# Altium PCB Mesanin.PcbDoc (part 1 of 2)
Units mm, origin at the board's own origin, x right, y up, seen from the top; angles counter-clockwise.
Board outline 85.5 x 78 mm, 4 copper layers (Top Layer, GND, UCCio, UCC), stack 0.602 mm thick; 40 components, 123 nets, 448 pads, 167 vias.
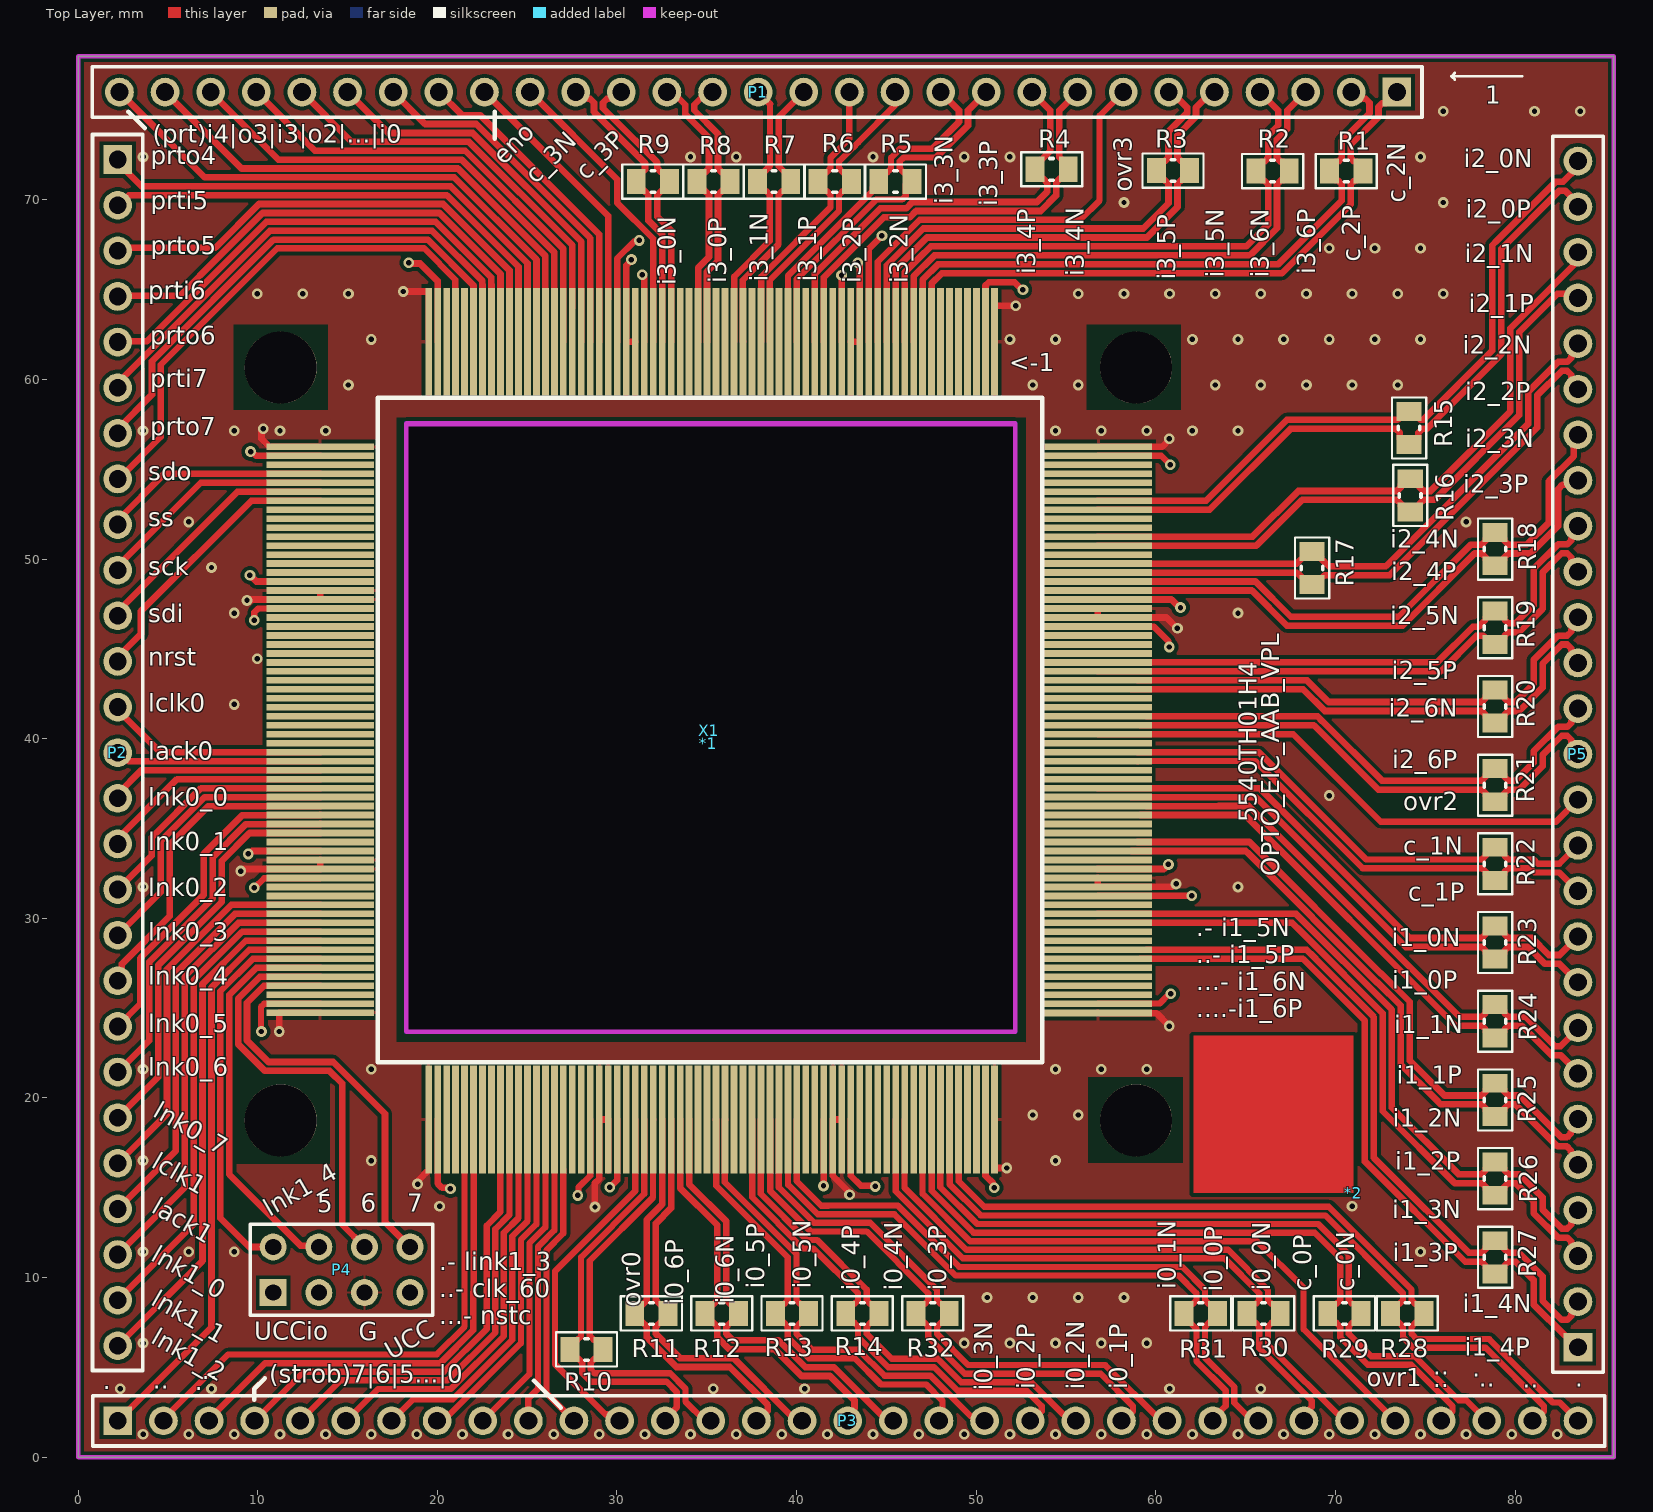
[diagram p0: Top Layer view]
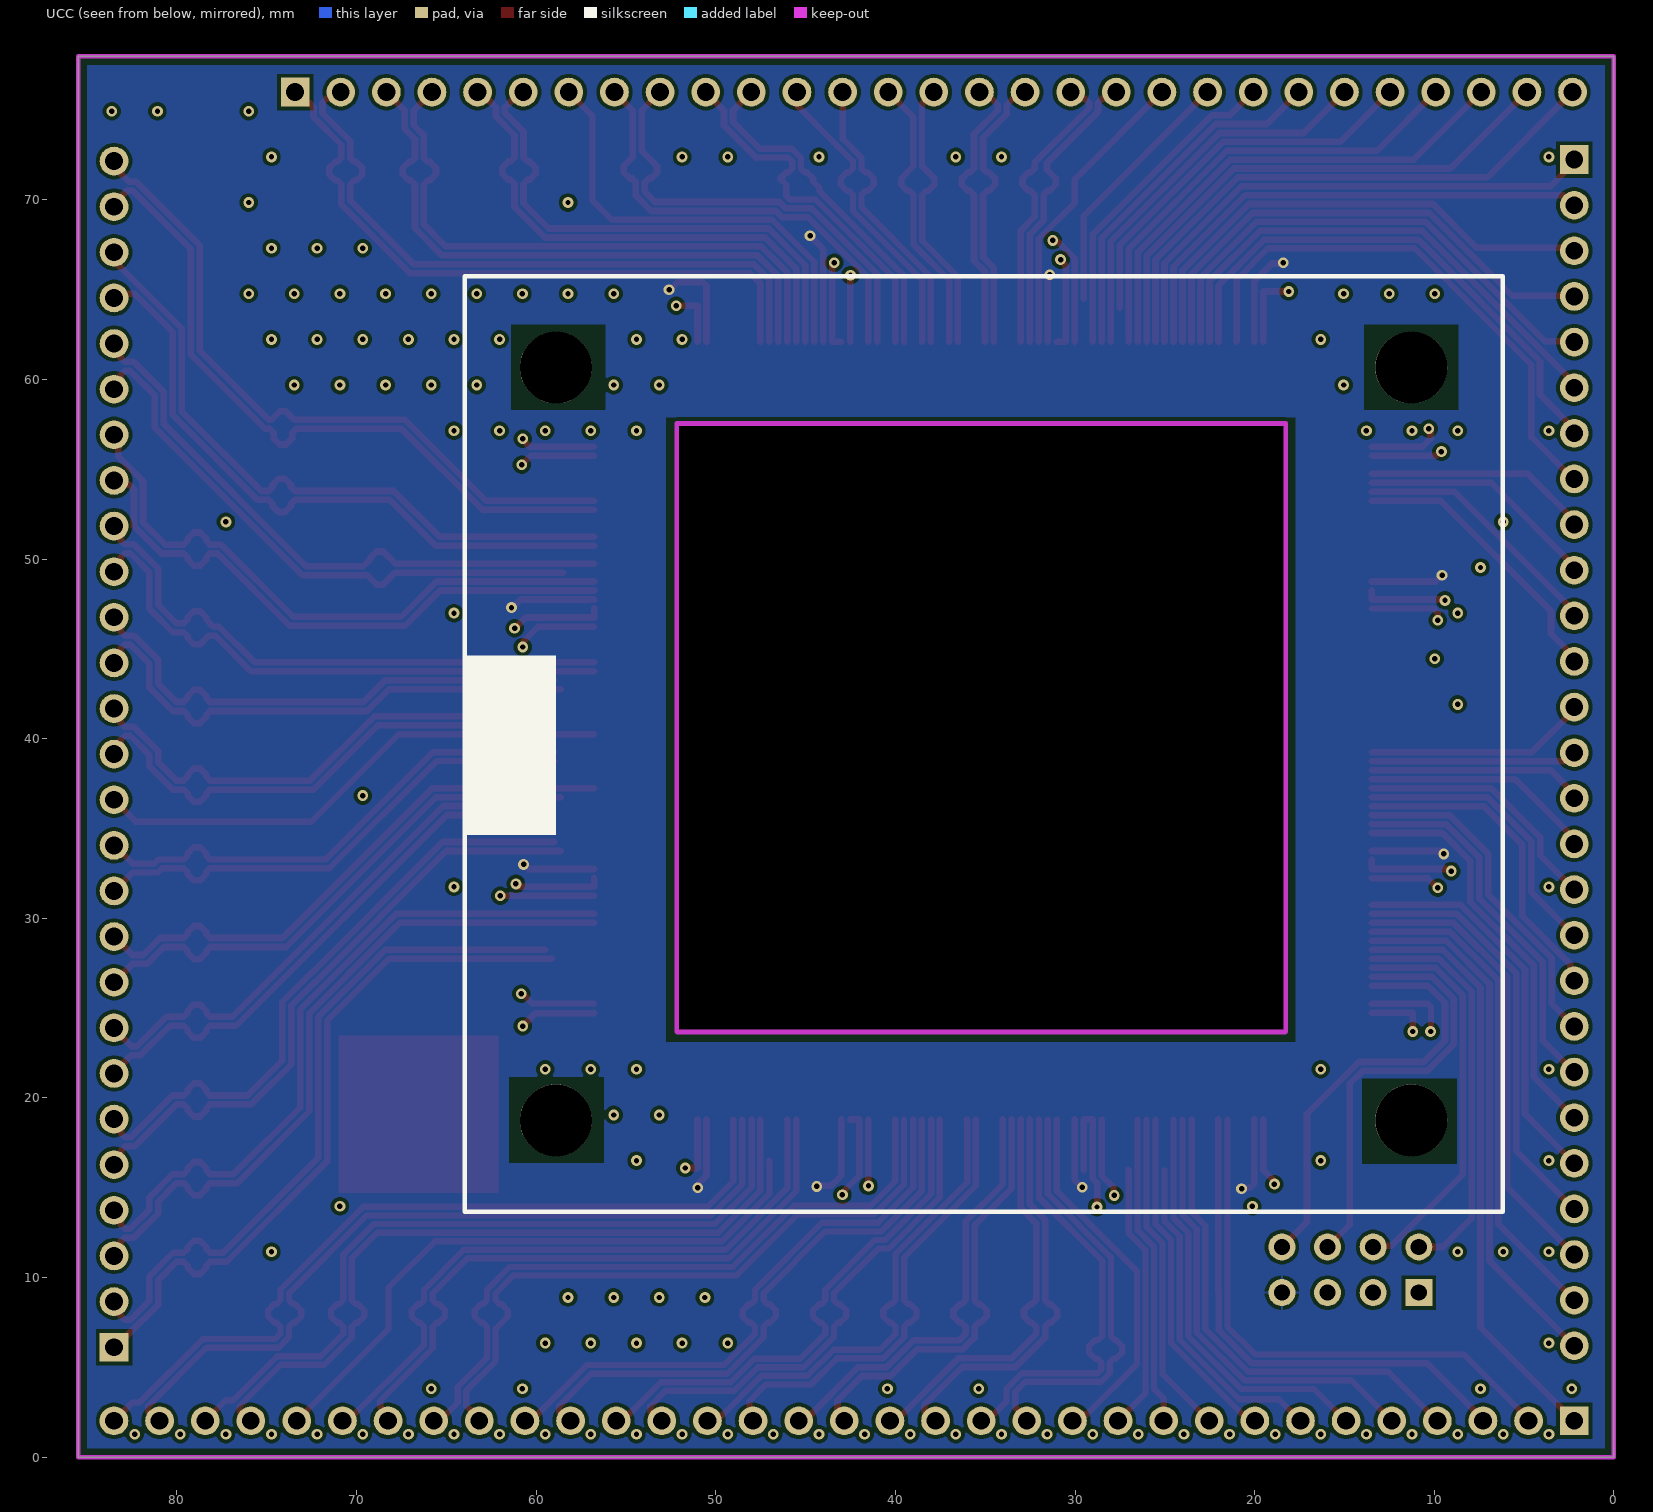
[diagram p1: UCC view, seen from below]
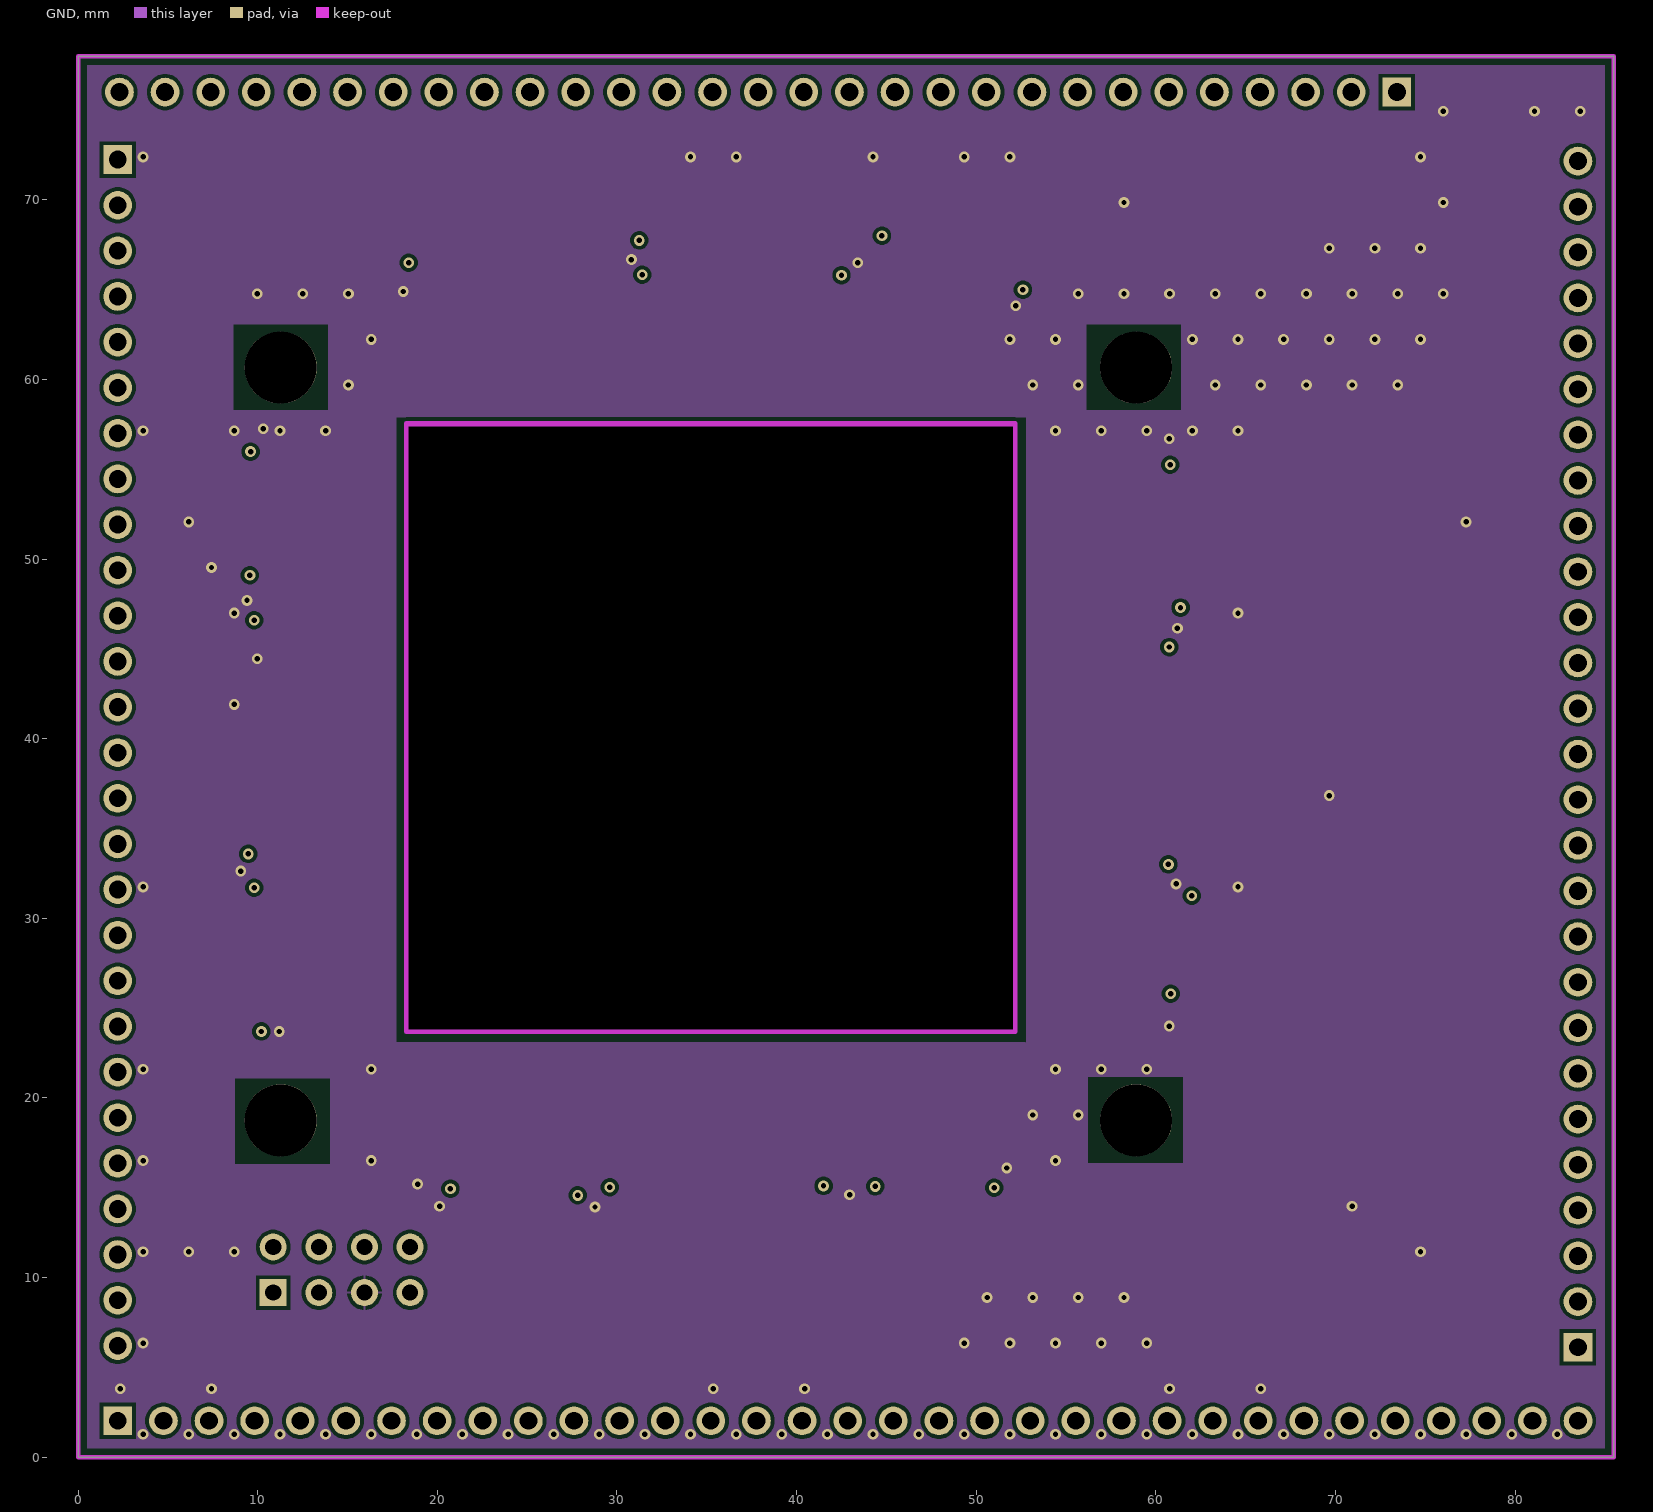
[diagram p2: GND]
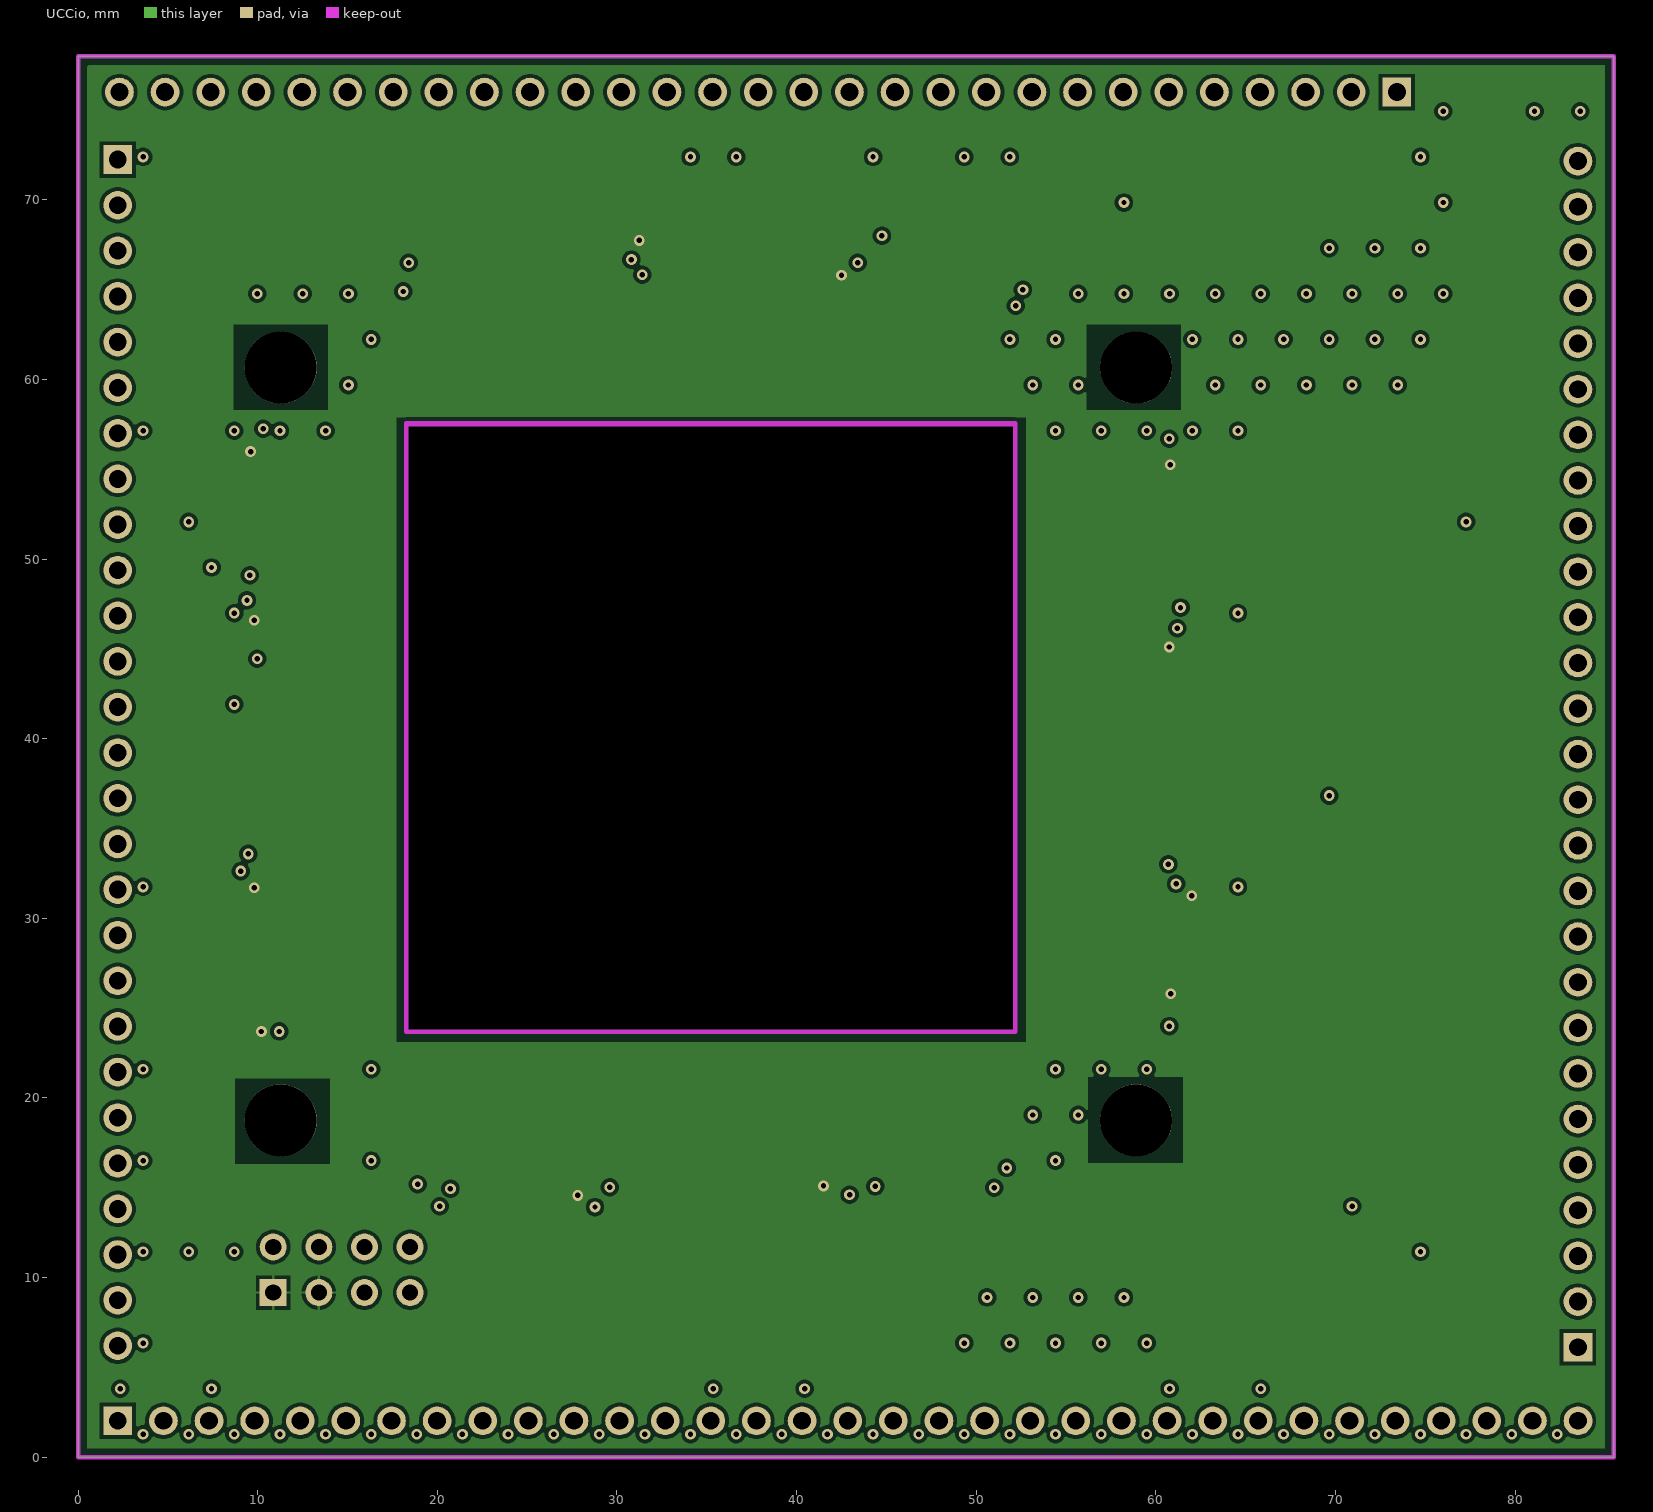
[diagram p3: UCCio]

## Layer stack, top to bottom
Top Solder: solder mask 0.0102, Solder Resist, Dk 3.5
Top Layer: signal copper 0.035
Dielectric 2: prepreg 0.0711, PP-006, Dk 4.1
GND: signal copper 0.035
Dielectric 1: dielectric 0.32, FR-4, Dk 4.8
UCCio: signal copper 0.035
Dielectric 3: prepreg 0.0711, PP-006, Dk 4.1
UCC: signal copper 0.035
Bottom Solder: solder mask 0.0102, Solder Resist, Dk 3.5

## Board outline
0,0 0,78 85.5,78 85.5,0
cut-out: 18.265,57.416 52.175,57.416 52.175,23.558 18.265,23.558

## Design rules (kind name [scope] priority, off if disabled: settings)
BoardOutlineClearance [OnLayer('Multi-Layer')] p1: gap=0.254 ignorepadtopadclearanceinfootprint=FALSE except(0: Arc-SplitContinuation Track-SplitContinuation SMDPad-SplitContinuation THPad-SplitContinuation Via-SplitContinuation Fill-SplitContinuation Poly-SplitContinuation Region-SplitContinuation Text-SplitContinuation; 0.4: Arc-OutlineEdge Track-OutlineEdge SMDPad-OutlineEdge THPad-OutlineEdge Via-OutlineEdge Fill-OutlineEdge Poly-OutlineEdge Region-OutlineEdge Text-OutlineEdge)
Clearance [All] p1: gap=0.125 ignorepadtopadclearanceinfootprint=FALSE except(0.2: Arc-Fill Arc-Poly Track-Fill Track-Poly SMDPad-Fill SMDPad-Poly THPad-Fill THPad-Poly Via-Fill Via-Poly Fill-Fill Fill-Poly Poly-Poly Poly-Region Poly-Text; 0.25: Arc-Hole Track-Hole SMDPad-Hole THPad-Hole Via-Hole Fill-Hole Poly-Hole Region-Hole Text-Hole) // Standart
DiffPairsRouting [All] p1: maxlimit=0.254 minlimit=0.127 mostfreqgap=0.13 toplayer_minwidth=0.127 toplayer_maxwidth=0.381 toplayer_prefwidth=0.37 midlayer1_minwidth=0.127 midlayer1_maxwidth=0.381 midlayer1_prefwidth=0.37 midlayer2_minwidth=0.127 midlayer2_maxwidth=0.381 midlayer2_prefwidth=0.37 bottomlayer_minwidth=0.127 bottomlayer_maxwidth=0.381 bottomlayer_prefwidth=0.37 maxuncoupledlength=12.7
HoleSize [All] p1: absolutevalues=TRUE maxlimit=5 minlimit=0.3 maxpercent=80.000 minpercent=20.000
MinimumSolderMaskSliver [All] p1: minsoldermaskwidth=0.1
PlaneClearance "PlaneClearance-1 1/2 Oz" [All] p1: clearance=0.2 // Standart
PlaneConnect "TermalConnect-1 1/2 Oz" [All] p1: planeconnectstyle=Relief reliefexpansion=0.2 reliefentries=4 reliefconductorwidth=0.2 reliefairgap=0.2 // Standart
PolygonConnect "PolygonConnect-1 1/2 Oz" [All] p1: thpad.connectstyle=Relief thpad.reliefconductorwidth=0.15 thpad.reliefentries=4 thpad.polygonreliefangle="90 Angle" thpad.airgapwidth=0.2 smdpad.connectstyle=Relief smdpad.reliefconductorwidth=0.2 smdpad.reliefentries=4 smdpad.polygonreliefangle="90 Angle" smdpad.airgapwidth=0.2 via.connectstyle=Direct via.reliefconductorwidth=0.254 via.reliefentries=4 via.polygonreliefangle="90 Angle" via.airgapwidth=0.254 // Standart
RoutingVias [All] p1: holewidth=0.3 width=1.27 viastyle="Through Hole" minholewidth=0.3 minwidth=0.6 maxholewidth=0.711 maxwidth=1.27
SilkToSilkClearance [All] p1: silktosilkclearance=0
SilkToSolderMaskClearance [IsPad] p1: minsilkscreentomaskgap=0 clearancetoexposedcopper=TRUE
SolderMaskExpansion [All] p1: expansion=0.102 istentingtop=FALSE
UnRoutedNet [All] p1: checkbadconnections=TRUE
Width [All] p1: maxlimit=2.5 minlimit=0.125 preferedwidth=0.37
22 further rules are at their usual default settings.

## Classes and differential pairs
differential pair adci1_1: +adci1_1_P -adci1_1_N
differential pair adci1_0: +adci1_0_P -adci1_0_N
differential pair adci3_6: +adci3_6_p -adci3_6_n
differential pair adci3_5: +adci3_5_p -adci3_5_n
differential pair adci3_4: +adci3_4_p -adci3_4_n
differential pair adci3_3: +adci3_3_p -adci3_3_n
differential pair adci3_2: +adci3_2_p -adci3_2_n
differential pair adci3_1: +adci3_1_p -adci3_1_N
differential pair adci3_0: +adci3_0_P -adci3_0_N
differential pair adci2_6: +adci2_6_P -adci2_6_N
differential pair adci2_5: +adci2_5_P -adci2_5_N
differential pair adci2_4: +adci2_4_P -adci2_4_N
differential pair adci2_3: +adci2_3_P -adci2_3_N
differential pair adci2_2: +adci2_2_P -adci2_2_N
differential pair adci2_1: +adci2_1_P -adci2_1_N
differential pair adci2_0: +adci2_0_P -adci2_0_N
differential pair adci1_6: +adci1_6_P -adci1_6_N
differential pair adci1_5: +adci1_5_P -adci1_5_N
differential pair adci1_4: +adci1_4_P -adci1_4_N
differential pair adci1_3: +adci1_3_P -adci1_3_N
differential pair adci1_2: +adci1_2_P -adci1_2_N
differential pair adci0_6: +adci0_6_P -adci0_6_N
differential pair adci0_5: +adci0_5_P -adci0_5_N
differential pair adci0_4: +adci0_4_P -adci0_4_N
differential pair adci0_3: +adci0_3_P -adci0_3_N
differential pair adci0_2: +adci0_2_P -adci0_2_N
differential pair adci0_1: +adci0_1_P -adci0_1_N
differential pair adci0_0: +adci0_0_P -adci0_0_N
differential pair adcc_3: +adcc_3_P -adcc_3_N
differential pair adcc_2: +adcc_2_p -adcc_2_n
differential pair adcc_1: +adcc_1_P -adcc_1_N
differential pair adcc_0: +adcc_0_P -adcc_0_N

## Components (designator, comment, footprint, x,y, rotation, side; value= is the part's Value field where it differs from the comment)
*1 "Грелка" Грелка 35.087,39.705 r90 top locked
*2 "Номер образца" "Номер образца" 71,14.7 r0 top
P1 "Top" HEADER29 75.174,76.044 r180 top locked
P2 "Left" HEADER27 1.72,79.923 r270 top locked
P3 "Bottom" HEADER33 -2.814,0.779 r0 top locked
P4 "Header 4X2" HDR2X4 10.86,9.16 r0 top
P5 "Right" HEADER27 83.98,-1.563 r90 top locked
R1 "100" RES_0805 70.6,71.6 r180 top
R2 "100" RES_0805 66.5,71.6 r180 top
R3 "100" RES_0805 60.957,71.628 r180 top
R4 "100" RES_0805 54.2,71.7 r0 top
R5 "100" RES_0805 45.5,71.016 r180 top locked
R6 "100" RES_0805 42.125,71.016 r0 top locked
R7 "100" RES_0805 38.75,71.016 r180 top locked
R8 "100" RES_0805 35.375,71.016 r180 top locked
R9 "100" RES_0805 32,71.016 r180 top locked
R10 "100" RES_0805 28.3,6 r180 top
R11 "100" RES_0805 31.915,8 r180 top locked
R12 "100" RES_0805 35.83,8 r180 top locked
R13 "100" RES_0805 39.745,8 r180 top locked
R14 "100" RES_0805 43.66,8 r180 top locked
R15 "100" RES_0805 74.1,57.3 r270 top
R16 "100" RES_0805 74.162,53.544 r270 top locked
R17 "100" RES_0805 68.7,49.5 r270 top locked
R18 "100" RES_0805 78.887,50.556 r270 top locked
R19 "100" RES_0805 78.887,46.175 r270 top locked
R20 "100" RES_0805 78.887,41.794 r270 top locked
R21 "100" RES_0805 78.887,37.412 r270 top locked
R22 "100" RES_0805 78.887,33.031 r270 top locked
R23 "100" RES_0805 78.887,28.65 r270 top locked
R24 "100" RES_0805 78.887,24.269 r270 top locked
R25 "100" RES_0805 78.887,19.887 r270 top locked
R26 "100" RES_0805 78.887,15.506 r270 top locked
R27 "100" RES_0805 78.887,11.125 r270 top locked
R28 "100" RES_0805 74,8 r180 top locked
R29 "100" RES_0805 70.5,8 r180 top locked
R30 "100" RES_0805 66,8 r180 top locked
R31 "100" RES_0805 62.5,8 r180 top locked
R32 "100" RES_0805 47.575,8 r180 top locked
X1 "5540TH01H4" 5540TH01H4 35.275,40.499 r180 top locked

## Footprints (in the part's own frame and the unit in brackets; to place one, negate y for a bottom-side part, rotate by r counter-clockwise, add the part's x,y. Pads: shape width x height; smd on the part's side, far side on the other; paste and mask are expansions set on the pad)
5540TH01H4 [mm]
  rect 0.375x6 smd: 1(-15.74,-21.601) 2(-15.24,-21.601) 3(-14.74,-21.601) 4(-14.24,-21.601) 5(-13.74,-21.601) 6(-13.24,-21.601) 7(-12.74,-21.601) 8(-12.24,-21.601) 9(-11.74,-21.601) 10(-11.24,-21.601) 11(-10.74,-21.601) 12(-10.24,-21.601) 13(-9.74,-21.601) 14(-9.24,-21.601) 15(-8.74,-21.601) 16(-8.24,-21.601) 17(-7.74,-21.601) 18(-7.24,-21.601) 19(-6.74,-21.601) 20(-6.24,-21.601) 21(-5.74,-21.601) 22(-5.24,-21.601) 23(-4.74,-21.601) 24(-4.24,-21.601) 25(-3.74,-21.601) 26(-3.24,-21.601) 27(-2.74,-21.601) 28(-2.24,-21.601) 29(-1.74,-21.601) 30(-1.24,-21.601) 31(-0.74,-21.601) 32(-0.24,-21.601) 33(0.26,-21.601) 34(0.76,-21.601) 35(1.26,-21.601) 36(1.76,-21.601) 37(2.26,-21.601) 38(2.76,-21.601) 39(3.26,-21.601) 40(3.76,-21.601) 41(4.26,-21.601) 42(4.76,-21.601) 43(5.26,-21.601) 44(5.76,-21.601) 45(6.26,-21.601) 46(6.76,-21.601) 47(7.26,-21.601) 48(7.76,-21.601) 49(8.26,-21.601) 50(8.76,-21.601) 51(9.26,-21.601) 52(9.76,-21.601) 53(10.26,-21.601) 54(10.76,-21.601) 55(11.26,-21.601) 56(11.76,-21.601) 57(12.26,-21.601) 58(12.76,-21.601) 59(13.26,-21.601) 60(13.76,-21.601) 61(14.26,-21.601) 62(14.76,-21.601) 63(15.26,-21.601) 64(15.76,-21.601) 129(15.76,21.701) 130(15.26,21.701) 131(14.76,21.701) 132(14.26,21.701) 133(13.76,21.701) 134(13.26,21.701) 135(12.76,21.701) 136(12.26,21.701) 137(11.76,21.701) 138(11.26,21.701) 139(10.76,21.701) 140(10.26,21.701) 141(9.76,21.701) 142(9.26,21.701) 143(8.76,21.701) 144(8.26,21.701) 145(7.76,21.701) 146(7.26,21.701) 147(6.76,21.701) 148(6.26,21.701) 149(5.76,21.701) 150(5.26,21.701) 151(4.76,21.701) 152(4.26,21.701) 153(3.76,21.701) 154(3.26,21.701) 155(2.76,21.701) 156(2.26,21.701) 157(1.76,21.701) 158(1.26,21.701) 159(0.76,21.701) 160(0.26,21.701) 161(-0.24,21.701) 162(-0.74,21.701) 163(-1.24,21.701) 164(-1.74,21.701) 165(-2.24,21.701) 166(-2.74,21.701) 167(-3.24,21.701) 168(-3.74,21.701) 169(-4.24,21.701) 170(-4.74,21.701) 171(-5.24,21.701) 172(-5.74,21.701) 173(-6.24,21.701) 174(-6.74,21.701) 175(-7.24,21.701) 176(-7.74,21.701) 177(-8.24,21.701) 178(-8.74,21.701) 179(-9.24,21.701) 180(-9.74,21.701) 181(-10.24,21.701) 182(-10.74,21.701) 183(-11.24,21.701) 184(-11.74,21.701) 185(-12.24,21.701) 186(-12.74,21.701) 187(-13.24,21.701) 188(-13.74,21.701) 189(-14.24,21.701) 190(-14.74,21.701) 191(-15.24,21.701) 192(-15.74,21.701)
  rect 6x0.375 smd: 65(21.8,-15.749) 66(21.8,-15.249) 67(21.8,-14.749) 68(21.8,-14.249) 69(21.8,-13.749) 70(21.8,-13.249) 71(21.8,-12.749) 72(21.8,-12.249) 73(21.8,-11.749) 74(21.8,-11.249) 75(21.8,-10.749) 76(21.8,-10.249) 77(21.8,-9.749) 78(21.8,-9.249) 79(21.8,-8.749) 80(21.8,-8.249) 81(21.8,-7.749) 82(21.8,-7.249) 83(21.8,-6.749) 84(21.8,-6.249) 85(21.8,-5.749) 86(21.8,-5.249) 87(21.8,-4.749) 88(21.8,-4.249) 89(21.8,-3.749) 90(21.8,-3.249) 91(21.8,-2.749) 92(21.8,-2.249) 93(21.8,-1.749) 94(21.8,-1.249) 95(21.8,-0.749) 96(21.8,-0.249) 97(21.8,0.251) 98(21.8,0.751) 99(21.8,1.251) 100(21.8,1.751) 101(21.8,2.251) 102(21.8,2.751) 103(21.8,3.251) 104(21.8,3.751) 105(21.8,4.251) 106(21.8,4.751) 107(21.8,5.251) 108(21.8,5.751) 109(21.8,6.251) 110(21.8,6.751) 111(21.8,7.251) 112(21.8,7.751) 113(21.8,8.251) 114(21.8,8.751) 115(21.8,9.251) 116(21.8,9.751) 117(21.8,10.251) 118(21.8,10.751) 119(21.8,11.251) 120(21.8,11.751) 121(21.8,12.251) 122(21.8,12.751) 123(21.8,13.251) 124(21.8,13.751) 125(21.8,14.251) 126(21.8,14.751) 127(21.8,15.251) 128(21.8,15.751) 193(-21.5,15.775) 194(-21.5,15.251) 195(-21.5,14.751) 196(-21.5,14.251) 197(-21.5,13.751) 198(-21.5,13.251) 199(-21.5,12.751) 200(-21.5,12.251) 201(-21.5,11.751) 202(-21.5,11.251) 203(-21.5,10.751) 204(-21.5,10.251) 205(-21.5,9.751) 206(-21.5,9.251) 207(-21.5,8.751) 208(-21.5,8.251) 209(-21.5,7.751) 210(-21.5,7.251) 211(-21.5,6.751) 212(-21.5,6.251) 213(-21.5,5.751) 214(-21.5,5.251) 215(-21.5,4.751) 216(-21.5,4.251) 217(-21.5,3.751) 218(-21.5,3.251) 219(-21.5,2.751) 220(-21.5,2.251) 221(-21.5,1.751) 222(-21.5,1.251) 223(-21.5,0.751) 224(-21.5,0.251) 225(-21.5,-0.249) 226(-21.5,-0.749) 227(-21.5,-1.249) 228(-21.5,-1.749) 229(-21.5,-2.249) 230(-21.5,-2.749) 231(-21.5,-3.249) 232(-21.5,-3.749) 233(-21.5,-4.249) 234(-21.5,-4.749) 235(-21.5,-5.249) 236(-21.5,-5.749) 237(-21.5,-6.249) 238(-21.5,-6.749) 239(-21.5,-7.249) 240(-21.5,-7.749) 241(-21.5,-8.249) 242(-21.5,-8.749) 243(-21.5,-9.249) 244(-21.5,-9.749) 245(-21.5,-10.249) 246(-21.5,-10.749) 247(-21.5,-11.249) 248(-21.5,-11.749) 249(-21.5,-12.249) 250(-21.5,-12.749) 251(-21.5,-13.249) 252(-21.5,-13.749) 253(-21.5,-14.249) 254(-21.5,-14.749) 255(-21.5,-15.249) 256(-21.525,-15.75)
  silkscreen extent -18.4,-18.47 18.6,18.52
HDR2X4 [mm] "Connector; Header; 4x2 Position"
  rect 1.5x1.5 hole 0.9: 1(0,0)
  round 1.5 hole 0.9: 2(0,2.54) 3(2.54,0) 4(2.54,2.54) 5(5.08,0) 6(5.08,2.54) 7(7.62,0) 8(7.62,2.54)
  silkscreen extent -1.27,-1.27 8.89,3.81
HEADER27 [mm]
  rect 1.6x1.6 hole 0.99: 1(7.683,0.48)
  round 1.6 hole 0.99: 2(10.223,0.48) 3(12.763,0.48) 4(15.303,0.48) 5(17.843,0.48) 6(20.383,0.48) 7(22.923,0.48) 8(25.463,0.48) 9(28.003,0.48) 10(30.543,0.48) 11(33.083,0.48) 12(35.623,0.48) 13(38.163,0.48) 14(40.703,0.48) 15(43.243,0.48) 16(45.783,0.48) 17(48.323,0.48) 18(50.863,0.48) 19(53.403,0.48) 20(55.943,0.48) 21(58.483,0.48) 22(61.023,0.48) 23(63.563,0.48) 24(66.103,0.48) 25(68.643,0.48) 26(71.183,0.48) 27(73.723,0.48)
  silkscreen extent 6.28,-0.92 75.1,1.88
HEADER29 [mm]
  rect 1.6x1.6 hole 0.99: 1(1.754,0.044)
  round 1.6 hole 0.99: 2(4.294,0.044) 3(6.834,0.044) 4(9.374,0.044) 5(11.914,0.044) 6(14.454,0.044) 7(16.994,0.044) 8(19.534,0.044) 9(22.074,0.044) 10(24.614,0.044) 11(27.154,0.044) 12(29.694,0.044) 13(32.234,0.044) 14(34.774,0.044) 15(37.314,0.044) 16(39.854,0.044) 17(42.394,0.044) 18(44.934,0.044) 19(47.474,0.044) 20(50.014,0.044) 21(52.554,0.044) 22(55.094,0.044) 23(57.634,0.044) 24(60.174,0.044) 25(62.714,0.044) 26(65.254,0.044) 27(67.794,0.044) 28(70.334,0.044) 29(72.874,0.044)
  silkscreen extent 0.35,-1.36 74.4,1.44
HEADER33 [mm]
  rect 1.6x1.6 hole 0.99: 1(5.019,1.24)
  round 1.6 hole 0.99: 2(7.559,1.24) 3(10.099,1.24) 4(12.639,1.24) 5(15.179,1.24) 6(17.719,1.24) 7(20.259,1.24) 8(22.799,1.24) 9(25.339,1.24) 10(27.879,1.24) 11(30.419,1.24) 12(32.959,1.24) 13(35.499,1.24) 14(38.039,1.24) 15(40.579,1.24) 16(43.119,1.24) 17(45.659,1.24) 18(48.199,1.24) 19(50.739,1.24) 20(53.279,1.24) 21(55.819,1.24) 22(58.359,1.24) 23(60.899,1.24) 24(63.439,1.24) 25(65.979,1.24) 26(68.519,1.24) 27(71.059,1.24) 28(73.599,1.24) 29(76.139,1.24) 30(78.699,1.24) 31(81.239,1.24) 32(83.779,1.24) 33(86.319,1.24)
  silkscreen extent 3.62,-0.16 87.8,2.64
RES_0805 [mm]
  rect 1.05x1.4 smd: 1(-0.925,0) 2(0.925,0)
  silkscreen extent -1.7,-0.95 1.7,0.95, body extent -1.1,-0.7 1.1,0.7, height 1
Грелка [mm]
  round 4 hole 4 unplated: 0(-20.955,23.813) 0(-20.955,-23.812) 0(20.955,23.813) 0(20.955,-23.812)
"Номер образца" [mm]
  Top Layer region: -8.915,-0.001 0,-0.001 0,8.762 -8.915,8.762

## Part data
P1: library part HEADER29
P2 P5: library part HEADER27
P3: library part HEADER33
P4: "Header, 4-Pin, Dual row", LatestRevisionDate=17-Jul-2002, LatestRevisionNote="Re-released for DXP Platform.", Publisher="Altium Limited"
R1 R2 R3 R4 R5 R6 R7 R8 R9 R10 R11 R12 R13 R14 R15 R16 R17 R18 R19 R20 R21 R22 R23 R24 R25 R26 R27 R28 R29 R30 R31 R32: library part RES

## Via types
v1: diameter 0.6, hole 0.3, Top Layer to UCC, 167 vias

## Nets (pads, with @x,y where several pads share a name; then routed paths per layer and width w, separated by ;. In a path a pad name is that pad's centre, name@x,y a point inside that pad or via, vN(x,y) a via of type N, cw(c..) or ccw(c..) an arc to the next point about the centre after c; other vN are vias at no path point)
adcc_0_N: P3.28 R30.1 X1.182 | length 36.3
  Top Layer w0.35: X1.182@46.015,18.798 46.005,18.788 46.005,14.997 49.456,11.546 64.022,11.546 66.24,9.328 66.24,8.73 66.445,8.525 66.575,8.525 66.925,8.175 R30.1@66.925,8 ; R30.1@66.925,7.825 66.575,7.475 66.445,7.475 66.24,7.27 66.24,6.871 66.24,6.261 70.482,2.02 P3.28@70.785,2.02
adcc_0_P: P3.27 R30.2 X1.181 | length 35.6
  Top Layer w0.35: X1.181@45.515,18.798 45.525,18.788 45.525,14.798 49.257,11.066 63.823,11.066 65.76,9.129 65.76,8.73 65.555,8.525 65.425,8.525 65.075,8.175 R30.2@65.075,8 ; R30.2@65.075,7.825 65.425,7.475 65.555,7.475 65.76,7.27 65.76,6.672 65.76,6.063 68.683,3.14 68.683,2.795 68.245,2.358 P3.27@68.245,2.02
adcc_1_N: P5.12 R22.1 X1.222 | length 28.2
  Top Layer w0.35: X1.222@59,39.238 65.743,39.238 71.709,33.271 78.157,33.271 78.362,33.476 78.362,33.606 78.712,33.956 R22.1@78.887,33.956 79.062,33.956 79.412,33.606 79.412,33.476 79.618,33.271 81.032,33.271 81.273,33.03 82.47,33.03 P5.12@83.5,34.06
adcc_1_P: P5.11 R22.2 X1.221 | length 28.2
  Top Layer w0.35: X1.221@59,38.737 59.02,38.758 65.544,38.758 71.511,32.791 78.157,32.791 78.362,32.586 78.362,32.456 78.712,32.106 R22.2@78.887,32.106 79.062,32.106 79.412,32.456 79.412,32.586 79.618,32.791 80.833,32.791 81.074,32.55 82.47,32.55 P5.11@83.5,31.52
adcc_2_n: P1.1 R1.1 X1.8 | length 36.5
  Top Layer w0.37: X1.8@47.515,62.1 47.517,62.103 47.517,65.344 48.082,65.909 67.009,65.909 70.85,69.75 70.85,70.868 71.067,71.085 71.185,71.085 71.525,71.425 R1.1@71.525,71.6 71.525,71.775 71.185,72.115 71.067,72.115 70.85,72.332 70.85,73.068 72.4,74.618 72.4,75.168 72.617,75.385 72.805,75.385 P1.1@73.42,76
adcc_2_p: P1.2 R1.2 X1.9 | length 36.7
  Top Layer w0.37: X1.9@47.015,62.1 47.015,64.913 47.017,64.915 47.017,65.551 47.875,66.409 66.802,66.409 70.35,69.957 70.35,70.868 70.133,71.085 70.015,71.085 69.675,71.425 R1.2@69.675,71.6 69.675,71.775 70.015,72.115 70.133,72.115 70.35,72.332 70.35,73.275 71.9,74.825 71.9,75.41 71.683,75.627 71.586,75.627 71.213,76 P1.2@70.88,76
adcc_3_N: P1.19 R9.2 X1.38 | length 16.6
  Top Layer w0.37: P1.19@27.7,76 28.033,76 28.406,75.627 28.503,75.627 28.72,75.41 28.72,74.897 29.472,74.145 31.563,72.054 31.563,71.678 31.075,71.191 31.075,70.841 31.415,70.501 31.533,70.501 31.75,70.284 31.75,68.85 32.515,68.085 X1.38@32.515,62.1
adcc_3_P: P1.18 R9.1 X1.37 | length 16.8
  Top Layer w0.37: P1.18@30.24,76 29.907,76 29.534,75.627 29.437,75.627 29.22,75.41 29.22,75.104 29.679,74.645 32.25,72.074 32.25,71.748 32.467,71.531 32.585,71.531 32.925,71.191 32.925,70.841 32.585,70.501 32.467,70.501 32.25,70.284 32.25,69.057 33.015,68.292 X1.37@33.015,62.1
adci0_0_N: P3.26 R31.1 X1.170 | length 38.1
  Top Layer w0.35: X1.170@40.025,18.787 X1.170@40.015,18.798 40.005,18.788 40.005,15.369 41.371,14.002 41.754,14.002 41.757,14.005 45.644,14.005 49.06,10.589 61.479,10.589 62.74,9.328 62.74,8.73 62.945,8.525 63.075,8.525 63.425,8.175 R31.1@63.425,8 63.425,7.825 63.075,7.475 62.945,7.475 62.74,7.27 62.74,6.871 62.74,5.531 64.362,3.909 64.362,3.025 65.367,2.02 P3.26@65.705,2.02
adci0_0_P: P3.25 R31.2 X1.169 | length 37.6
  Top Layer w0.35: X1.169@39.515,18.798 39.525,18.788 39.525,15.17 41.17,13.525 45.445,13.525 48.861,10.109 60.891,10.109 60.894,10.112 61.277,10.112 62.26,9.129 62.26,8.73 62.055,8.525 61.925,8.525 61.575,8.175 R31.2@61.575,8 61.575,7.825 62.26,7.14 62.26,5.336 63.885,3.711 63.885,2.85 63.165,2.13 P3.25@63.165,2.02
adci0_1_N: P3.24 R32.1 X1.168 | length 32.9
  Top Layer w0.35: X1.168@39.015,18.798 39.005,18.788 39.005,15.015 40.972,13.048 44.095,13.048 47.815,9.328 47.815,8.73 48.02,8.525 48.15,8.525 48.5,8.175 R32.1@48.5,8 48.5,7.825 48.15,7.475 48.02,7.475 47.815,7.27 47.815,6.871 49.559,5.127 57.18,5.127 60.287,2.02 P3.24@60.625,2.02
adci0_1_P: P3.23 R32.2 X1.167 | length 32.5
  Top Layer w0.35: X1.167@38.515,18.798 38.525,18.788 38.525,14.816 40.773,12.568 43.896,12.568 47.335,9.129 47.335,8.73 47.13,8.525 47,8.525 46.65,8.175 R32.2@46.65,8 46.65,7.825 47,7.475 47.13,7.475 47.335,7.27 47.335,6.672 49.361,4.647 56.927,4.647 58.73,2.844 58.73,2.554 58.196,2.02 P3.23@58.085,2.02
adci0_2_N: P3.22 R14.1 X1.166 | length 29.1
  Top Layer w0.35: X1.166@38.015,18.798 38.005,18.788 38.005,14.662 40.576,12.091 41.139,12.091 43.902,9.328 43.902,8.73 44.108,8.525 44.237,8.525 44.587,8.175 44.587,7.825 44.237,7.475 44.108,7.475 43.902,7.27 43.902,6.871 45.293,5.48 47.853,5.48 49.163,4.17 53.057,4.17 54.551,2.676 55.207,2.02 P3.22@55.545,2.02
adci0_2_P: P3.21 R14.2 X1.165 | length 28.6
  Top Layer w0.35: X1.165@37.515,18.798 37.525,18.788 37.525,14.463 40.377,11.611 40.94,11.611 43.422,9.129 43.422,8.73 43.217,8.525 43.087,8.525 42.737,8.175 42.737,8 42.737,7.825 43.087,7.475 43.217,7.475 43.422,7.27 43.422,6.672 45.095,5 47.654,5 48.964,3.69 52.415,3.69 52.418,3.693 52.801,3.693 53.65,2.844 53.65,2.554 53.116,2.02 P3.21@53.005,2.02
adci0_3_N: P3.20 R13.1 X1.162 | length 26.8
  Top Layer w0.35: X1.162@36.025,18.787 X1.162@36.015,18.798 36.005,18.788 36.005,15.308 39.99,11.323 39.99,8.73 40.195,8.525 40.325,8.525 40.675,8.175 40.675,8 40.675,7.825 40.325,7.475 40.195,7.475 39.99,7.27 39.99,6.871 40.881,5.98 43.44,5.98 44.897,4.523 47.456,4.523 49.72,2.259 50.226,2.259 P3.20@50.465,2.02
adci0_3_P: P3.19 R13.2 X1.161 | length 25.8
  Top Layer w0.35: X1.161@35.504,18.787 X1.161@35.515,18.798 35.525,18.788 35.525,15.109 39.51,11.124 39.51,8.73 39.305,8.525 39.175,8.525 38.825,8.175 38.825,8 38.825,7.825 39.175,7.475 39.305,7.475 39.51,7.27 39.51,6.672 40.682,5.5 43.241,5.5 44.698,4.043 46.868,4.043 46.871,4.046 47.211,4.046 48.117,3.14 48.117,2.211 P3.19@47.925,2.02
adci0_4_N: P3.18 R12.1 X1.158 | length 24.8
  Top Layer w0.37: X1.158@34.015,18.798 34.015,15.193 36.087,13.12 36.087,8.732 36.304,8.515 36.422,8.515 36.762,8.175 36.762,8 36.762,7.825 36.422,7.485 36.304,7.485 36.087,7.268 36.087,6.861 36.436,6.512 38.981,6.512 40.48,5.013 42.068,5.013 42.07,5.011 45.062,2.02 P3.18@45.385,2.02
adci0_4_P: P3.17 R12.2 X1.157 | length 24.1
  Top Layer w0.37: X1.157@33.515,18.798 33.515,14.985 35.587,12.913 35.587,8.732 35.371,8.515 35.252,8.515 34.912,8.175 34.912,8 34.912,7.825 35.252,7.485 35.371,7.485 35.587,7.268 35.587,6.654 36.229,6.012 38.774,6.012 40.273,4.513 41.463,4.513 41.466,4.516 41.862,4.516 42.143,4.236 43.221,3.158 43.221,2.728 42.845,2.352 P3.17@42.845,2.02
adci0_5_N: P3.16 R11.1 X1.156 | length 23.1
  Top Layer w0.37: X1.156@33.015,18.798 33.015,13.867 32.165,13.017 32.165,8.732 32.382,8.515 32.5,8.515 32.84,8.175 R11.1@32.84,8 32.84,7.825 32.5,7.485 32.382,7.485 32.165,7.268 32.165,6.861 33.511,5.515 36.488,5.515 39.984,2.02 P3.16@40.305,2.02
adci0_5_P: P3.15 R11.2 X1.155 | length 22.7
  Top Layer w0.37: X1.155@32.515,18.798 32.515,14.074 31.665,13.224 31.665,8.732 31.448,8.515 31.33,8.515 30.99,8.175 R11.2@30.99,8 30.99,7.825 31.33,7.485 31.448,7.485 31.665,7.268 31.665,6.654 33.304,5.015 36.281,5.015 38.4,2.896 38.4,2.59 37.83,2.02 P3.15@37.765,2.02
adci0_6_N: P3.14 R10.1 X1.154 | length 24.4
  Top Layer w0.35: X1.154@32.015,18.798 32.005,18.788 32.005,14.454 28.48,10.929 28.48,6.745 28.7,6.525 28.875,6.525 29.225,6.175 29.225,5.825 28.875,5.475 28.745,5.475 28.54,5.27 28.54,4.877 28.745,4.672 32.961,4.672 33.81,3.823 33.81,3.097 34.887,2.02 P3.14@35.225,2.02
adci0_6_P: P3.13 R10.2 X1.153 | length 23.8
  Top Layer w0.35: X1.153@31.515,18.798 31.525,18.788 31.525,14.653 28,11.128 28,6.73 27.795,6.525 27.725,6.525 27.375,6.175 27.375,5.825 27.725,5.475 27.855,5.475 28.06,5.27 28.06,4.678 28.546,4.192 32.762,4.192 33.33,3.624 33.33,2.763 32.685,2.119 P3.13@32.685,2.02
adci1_0_N: P5.10 R23.1 X1.218 | length 31.7
  Top Layer w0.37: X1.218@56.775,37.248 65.773,37.247 74.121,28.9 78.156,28.9 78.372,29.117 78.372,29.235 78.712,29.575 R23.1@78.887,29.575 79.062,29.575 79.402,29.235 79.402,29.117 79.619,28.9 80.938,28.9 81.878,27.96 82.48,27.96 P5.10@83.5,28.98
adci1_0_P: P5.9 R23.2 X1.217 | length 29.8
  Top Layer w0.37: X1.217@58.646,36.747 65.566,36.747 73.913,28.4 78.156,28.4 78.372,28.183 78.372,28.065 78.712,27.725 R23.2@78.887,27.725 79.062,27.725 79.402,28.065 79.402,28.183 79.619,28.4 80.731,28.4 81.671,27.46 82.48,27.46 P5.9@83.5,26.44
adci1_1_N: P5.8 R24.1 X1.216 | length 30.6
  Top Layer w0.37: X1.216@59.5,36.248 63.402,36.248 ; 63.5,36.25 65.176,36.25 76.908,24.519 78.156,24.519 78.372,24.735 78.372,24.854 78.712,25.194 R24.1@78.887,25.194 79.062,25.194 79.402,24.854 79.402,24.735 79.619,24.519 80.589,24.519 82.228,22.88 82.534,22.88 83.5,23.846 P5.8@83.5,23.9
adci1_1_P: P5.7 R24.2 X1.215 | length 31
  Top Layer w0.37: X1.215@59.147,35.748 63.195,35.748 ; 63.195,35.75 64.969,35.75 76.701,24.019 78.156,24.019 78.372,23.802 78.372,23.684 78.712,23.344 R24.2@78.887,23.344 79.062,23.344 79.402,23.684 79.402,23.802 79.619,24.019 80.382,24.019 82.021,22.38 82.534,22.38 83.5,21.414 P5.7@83.5,21.36
adci1_2_N: P5.6 R25.1 X1.212 | length 34.6
  Top Layer w0.37: X1.212@59,34.248 65.213,34.248 72.555,26.906 72.579,26.906 74.134,25.351 74.134,22.075 76.072,20.137 78.156,20.137 78.372,20.354 78.372,20.472 78.712,20.812 R25.1@78.887,20.812 79.062,20.812 79.402,20.472 79.402,20.354 79.619,20.137 80.24,20.137 82.577,17.8 82.884,17.8 83.1,18.017 83.1,18.088 83.5,18.487 P5.6@83.5,18.82
adci1_2_P: P5.5 R25.2 X1.211 | length 34.9
  Top Layer w0.37: X1.211@58.647,33.748 65.006,33.748 65.127,33.627 72.347,26.406 72.372,26.406 73.634,25.143 73.634,21.868 75.572,19.93 75.865,19.637 78.156,19.637 78.372,19.421 78.372,19.302 78.712,18.962 R25.2@78.887,18.962 79.062,18.962 79.402,19.302 79.402,19.421 79.619,19.637 80.033,19.637 82.37,17.3 82.884,17.3 83.1,17.083 83.1,17.012 83.5,16.613 P5.5@83.5,16.28
adci1_3_N: P5.4 R26.1 X1.204 | length 38.9
  Top Layer w0.37: X1.204@56.775,30.248 67.803,30.248 73.137,24.913 73.137,19.463 76.844,15.756 78.156,15.756 78.372,15.973 78.372,16.091 78.712,16.431 R26.1@78.887,16.431 79.062,16.431 79.402,16.091 79.402,15.973 79.619,15.756 80.234,15.756 81.535,14.455 81.535,13.789 82.604,12.72 82.91,12.72 83.127,12.937 83.127,13.034 83.5,13.407 P5.4@83.5,13.74
adci1_3_P: P5.3 R26.2 X1.203 | length 38.9
  Top Layer w0.37: X1.203@56.775,29.748 67.596,29.748 68.138,29.205 68.422,28.922 72.637,24.706 72.637,19.256 76.637,15.256 78.156,15.256 78.372,15.039 78.372,14.921 78.712,14.581 R26.2@78.887,14.581 79.062,14.581 79.402,14.921 79.402,15.039 79.619,15.256 80.026,15.256 81.035,14.248 81.035,13.582 82.397,12.22 82.91,12.22 83.127,12.003 83.127,11.906 83.5,11.533 P5.3@83.5,11.2
adci1_4_N: P5.2 R27.1 X1.200 | length 39.3
  Top Layer w0.37: X1.200@59.5,28.248 68.393,28.248 68.777,27.864 69.072,27.568 72.14,24.501 72.14,16.663 72.703,16.1 72.704,16.1 77.429,11.375 78.156,11.375 78.372,11.592 78.372,11.71 78.712,12.05 R27.1@78.887,12.05 79.062,12.05 79.402,11.71 79.402,11.592 79.619,11.375 80.234,11.375 81.535,10.074 81.535,8.709 82.604,7.64 82.91,7.64 83.127,7.857 83.127,7.954 83.5,8.327 P5.2@83.5,8.66
adci1_4_P: P5.1 R27.2 X1.199 | length 39.4
  Top Layer w0.37: X1.199@59.147,27.748 68.186,27.748 71.64,24.293 71.64,16.46 77.225,10.875 78.156,10.875 78.372,10.658 78.372,10.54 78.712,10.2 R27.2@78.887,10.2 79.062,10.2 79.402,10.54 79.402,10.658 79.619,10.875 80.026,10.875 81.035,9.867 81.035,8.502 82.802,6.735 82.885,6.735 P5.1@83.5,6.12
adci1_5_N: P3.33 R28.1 X1.188 | length 45.6
  Top Layer w0.35: X1.188@49.015,18.798 49.025,18.787 49.025,15.354 50.442,13.937 69.631,13.937 74.24,9.328 74.24,8.73 74.445,8.525 74.575,8.525 74.925,8.175 R28.1@74.925,8 74.925,7.825 74.575,7.475 74.445,7.475 74.24,7.27 74.24,6.871 74.537,6.574 78.558,6.574 82.09,3.043 82.482,3.043 P3.33@83.505,2.02
adci1_5_P: P3.32 R28.2 X1.187 | length 45.1
  Top Layer w0.35: X1.187@48.515,18.798 48.525,18.788 48.525,15.18 50.248,13.457 50.438,13.457 69.432,13.457 73.76,9.129 73.76,8.73 73.555,8.525 73.425,8.525 73.075,8.175 R28.2@73.075,8 73.075,7.825 73.425,7.475 73.555,7.475 73.76,7.27 73.76,6.672 74.338,6.094 78.36,6.094 81.61,2.844 81.61,2.554 81.076,2.02 P3.32@80.965,2.02
adci1_6_N: P3.31 R29.1 X1.186 | length 42.9
  Top Layer w0.35: X1.186@48.015,18.798 48.005,18.788 48.005,15.025 50.05,12.98 69.04,12.98 70.74,11.28 70.74,8.73 70.945,8.525 71.075,8.525 71.425,8.175 R29.1@71.425,8 71.425,7.825 71.075,7.475 70.945,7.475 70.74,7.27 70.74,6.871 71.994,5.617 74.415,5.617 76.866,3.166 77.279,3.166 P3.31@78.425,2.02
adci1_6_P: P3.30 R29.2 X1.185 | length 42.4
  Top Layer w0.35: X1.185@47.515,18.798 47.525,18.788 47.525,14.826 49.851,12.5 68.841,12.5 70.26,11.081 70.26,8.73 70.055,8.525 69.925,8.525 69.575,8.175 R29.2@69.575,8 69.575,7.825 69.925,7.475 70.055,7.475 70.26,7.27 70.26,6.672 71.795,5.137 74.217,5.137 76.52,2.834 76.52,2.544 75.996,2.02 P3.30@75.885,2.02
adci2_0_N: P5.27 R15.1 X1.250 | length 38.6
  Top Layer w0.37: X1.250@56.775,53.248 62.79,53.248 67.293,57.75 73.45,57.75 73.925,58.225 74.275,58.225 74.75,57.75 74.877,57.75 78.733,61.606 78.733,67.476 79.026,67.769 82.271,71.014 82.687,71.014 83.5,71.827 P5.27@83.5,72.16
adci2_0_P: P5.26 R15.2 X1.249 | length 39.1
  Top Layer w0.37: X1.249@56.775,52.748 62.998,52.748 67.5,57.25 73.368,57.25 73.585,57.033 73.585,56.715 73.925,56.375 74.275,56.375 74.615,56.715 74.615,57.033 74.832,57.25 75.084,57.25 79.233,61.399 79.233,67.269 82.478,70.514 82.784,70.514 83.5,69.799 P5.26@83.5,69.62
adci2_1_N: P5.25 R16.1 X1.246 | length 37
  Top Layer w0.37: X1.246@56.775,51.248 65.39,51.248 67.936,53.794 73.431,53.794 73.647,54.01 73.647,54.129 73.987,54.469 R16.1@74.162,54.469 74.337,54.469 74.677,54.129 74.677,54.01 74.894,53.794 75.302,53.794 79.73,58.222 79.73,62.781 79.733,62.784 79.733,62.845 83.5,66.612 P5.25@83.5,67.08
adci2_1_P: P5.24 R16.2 X1.245 | length 36
  Top Layer w0.37: X1.245@56.775,50.748 65.597,50.748 68.143,53.294 73.431,53.294 73.647,53.077 73.647,52.959 73.987,52.619 R16.2@74.162,52.619 74.337,52.619 74.677,52.959 74.677,53.077 74.894,53.294 75.509,53.294 80.23,58.015 80.23,62.639 82.362,64.771 83.269,64.771 P5.24@83.5,64.54
adci2_2_N: P5.23 R17.1 X1.243 | length 33.8
  Top Layer w0.37: X1.243@56.775,49.748 67.848,49.748 68.525,50.425 68.875,50.425 69.215,50.085 69.215,50.01 69.625,49.6 72.81,49.6 80.727,57.517 80.727,59.31 82.397,60.98 82.91,60.98 83.127,61.197 83.127,61.294 83.5,61.667 P5.23@83.5,62
adci2_2_P: P5.22 R17.2 X1.242 | length 31.9
  Top Layer w0.37: X1.242@58.5,49.248 67.852,49.248 68.525,48.575 68.875,48.575 69.4,49.1 73.017,49.1 81.227,57.31 81.227,59.103 82.604,60.48 82.91,60.48 83.127,60.263 83.127,60.166 83.5,59.793 P5.22@83.5,59.46
adci2_3_N: P5.21 R18.1 X1.241 | length 34.3
  Top Layer w0.37: X1.241@56.775,48.748 65.553,48.748 67.509,46.791 73.526,46.791 77.541,50.806 78.156,50.806 78.372,51.023 78.372,51.141 78.712,51.481 R18.1@78.887,51.481 79.062,51.481 79.402,51.141 79.402,51.023 79.619,50.806 80.65,50.806 81.888,52.044 81.888,54.341 83.265,55.717 83.265,56.685 P5.21@83.5,56.92
adci2_3_P: P5.20 R18.2 X1.240 | length 32.8
  Top Layer w0.37: X1.240@56.775,48.248 65.346,48.248 67.302,46.291 73.734,46.291 77.748,50.306 78.156,50.306 78.372,50.089 78.372,49.971 78.712,49.631 R18.2@78.887,49.631 79.062,49.631 79.402,49.971 79.402,50.089 79.619,50.306 80.857,50.306 82.388,51.837 82.388,53.882 82.65,54.145 83.265,54.145 P5.20@83.5,54.38